# EAGLE board MSP430G2553 H-Bridge_Servo_Sensors Interface (EAGLE 8.6.3)
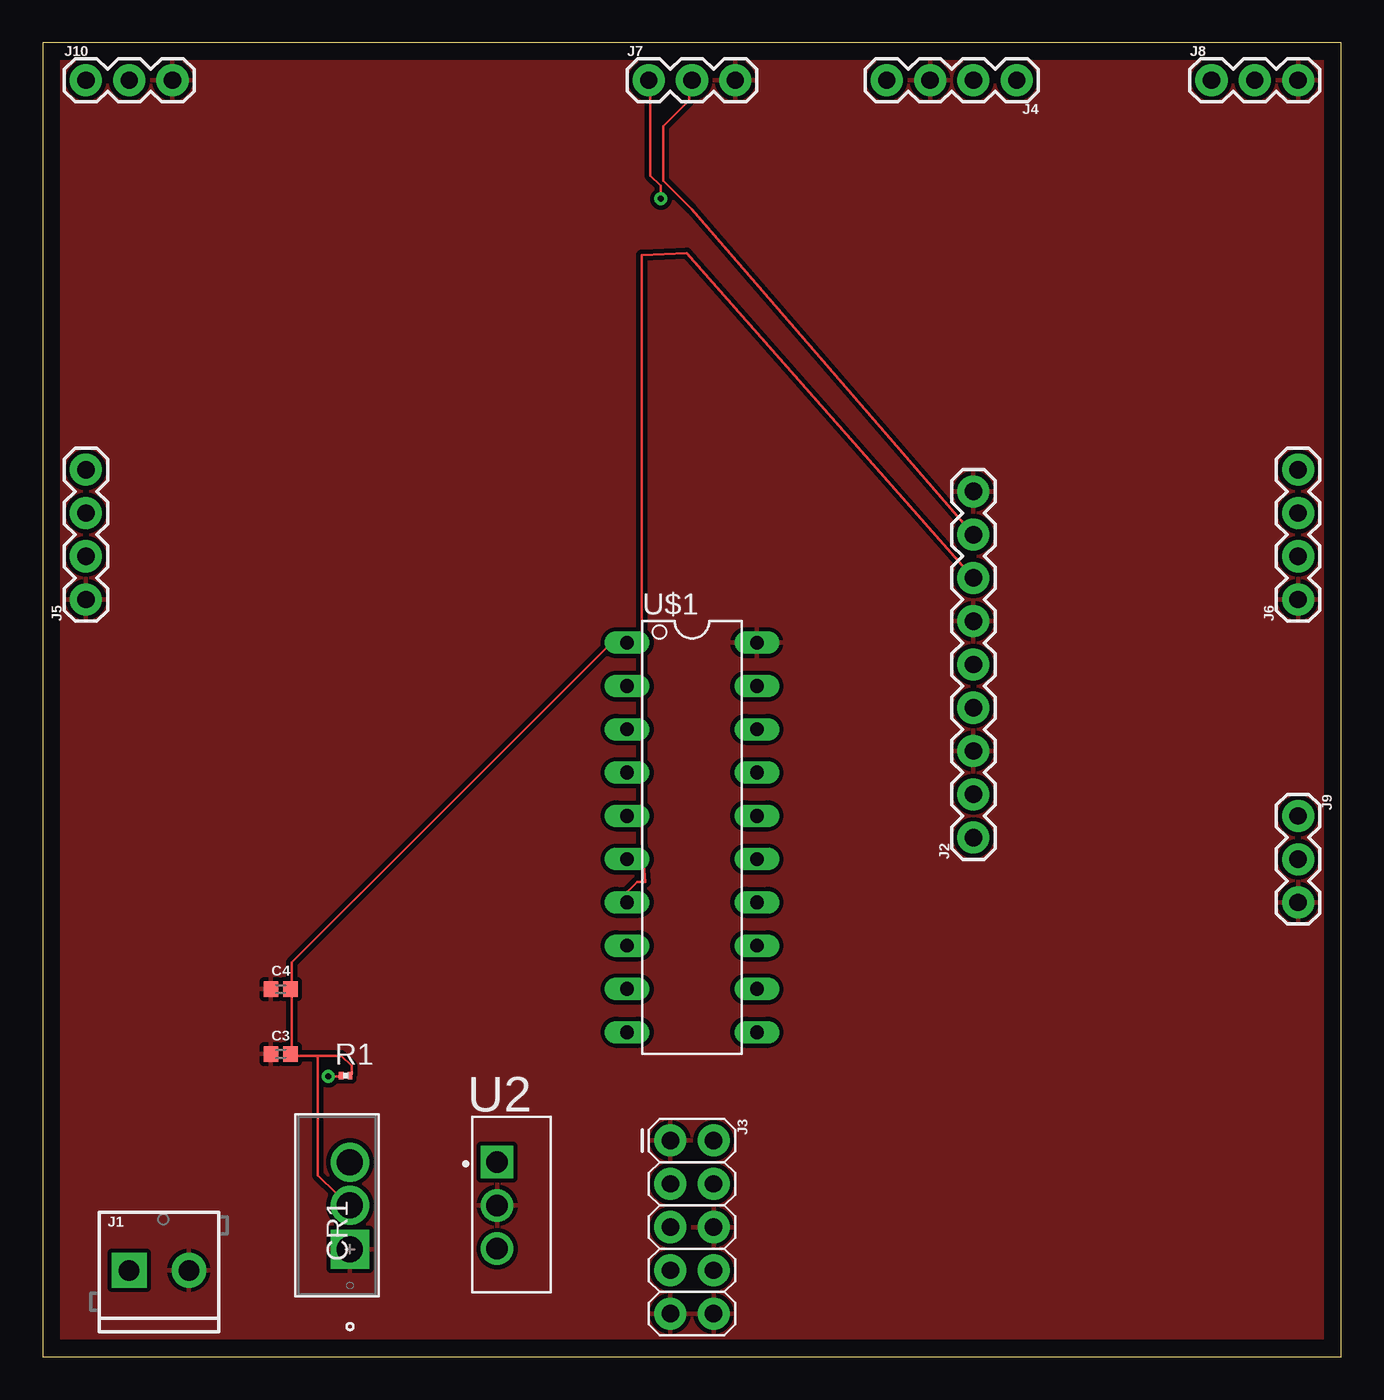
[diagram p0: board, top side]
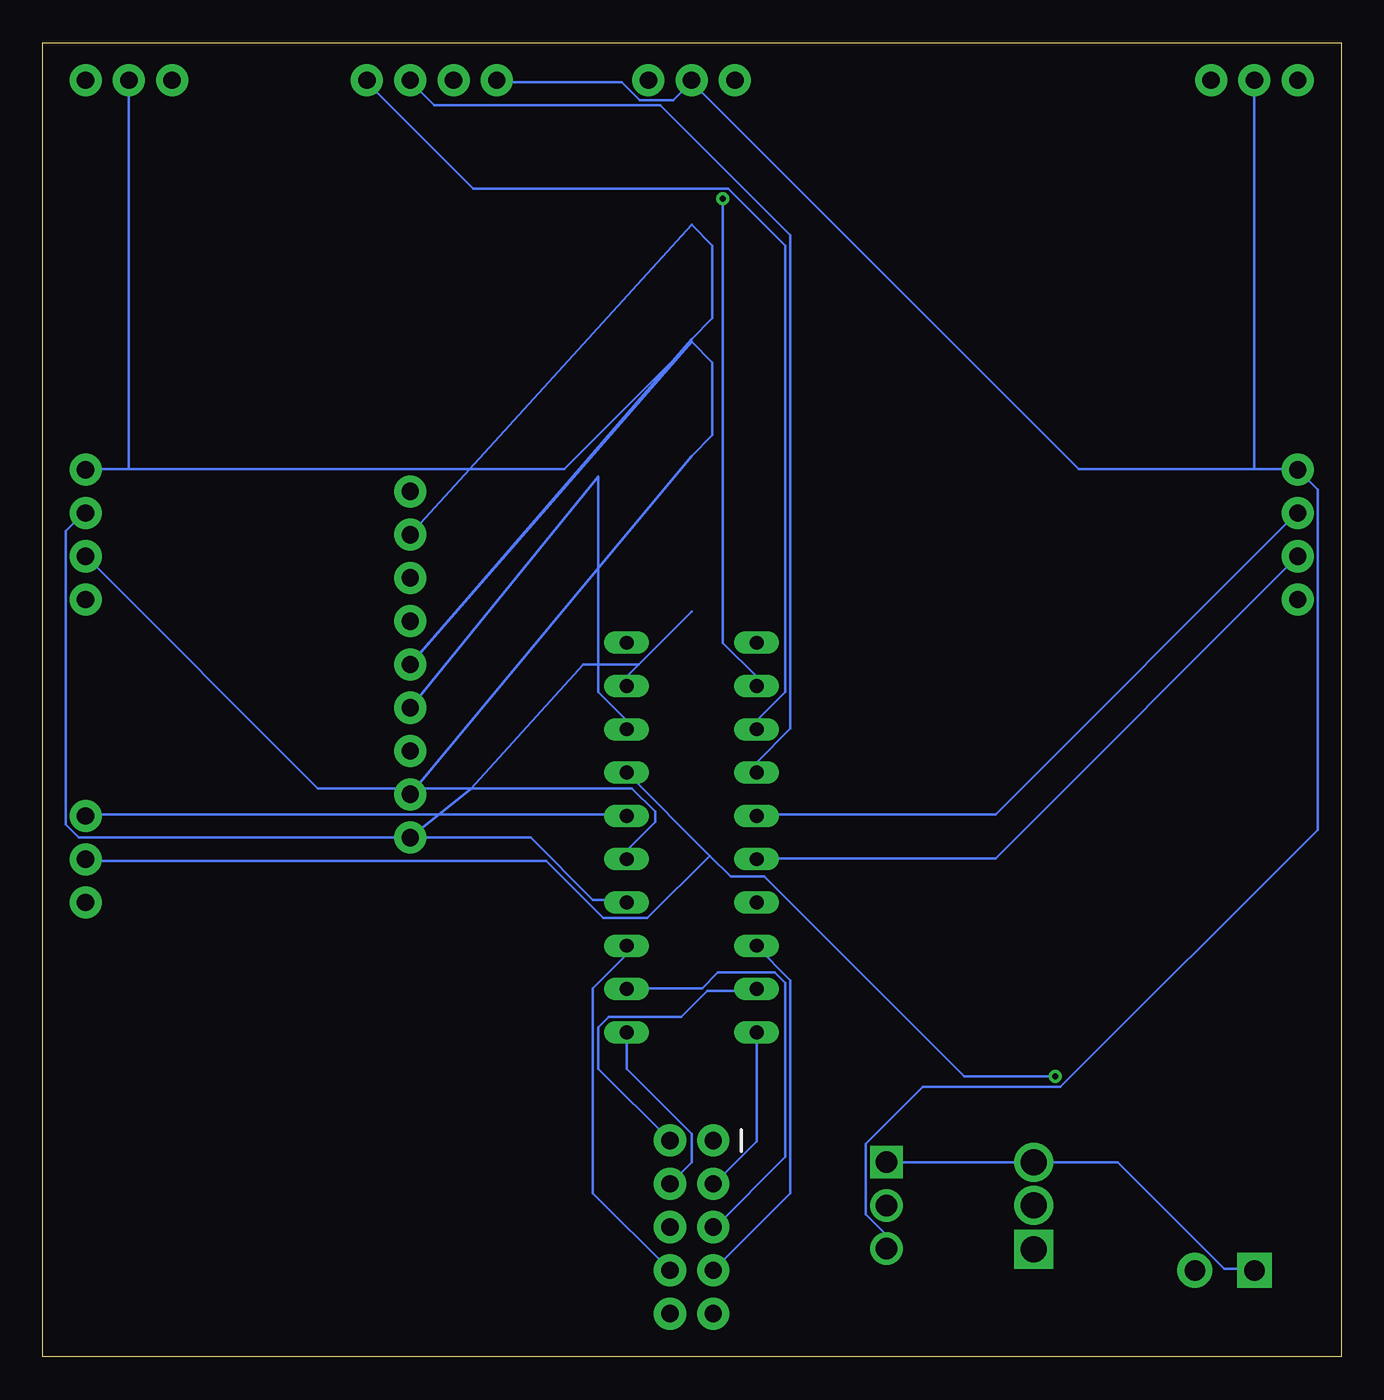
[diagram p1: board, bottom side, seen from below]

Size 76.18 x 77.14 mm. Coordinates in mm from the lower left corner, seen from the top.
Outline: 0,0 76.18,0 76.18,77.14 0,77.14 0,0
Copper layers (1*16): Top 0.035mm / dielectric 1.5mm / Bottom 0.035mm
Design rules "default *": minimum track width 6mil, minimum drill 0.35mm, track to track 5mil, track to pad 5mil, pad to pad 5mil, via to via 5mil, smd to smd 5mil, copper to edge 40mil, drill to drill 6mil, minimum pad ring 10mil, minimum via ring 8mil, stop-mask expansion 4mil, vias tented up to drill 0mil, thermal gap 10mil
Net classes: 0 default: width 0.305 mm, drill 0.508 mm, clearance 0.254 mm

## Footprints (pad centres in the part's own frame; a part is rotated, then mirrored left to right if it is on the bottom)
0402 = smd 0.85 x 0.9: 1 -0.58,0; 2 0.58,0
TO-220 = drill 1.524 pad 2.032 square: 1 -5.105,-1.524 | drill 1.524 pad 2.032: 2 -2.54,-1.524; 3 0,-1.524
SCREWTERMINAL-3.5MM-2 = drill 1.2 pad 2.032 square: 1 0,0 | drill 1.2 pad 2.032: 2 3.5,0
1X09 = drill 1.016 pad 1.88: 1 0,0; 2 2.54,0; 3 5.08,0; 4 7.62,0; 5 10.16,0; 6 12.7,0; 7 15.24,0; 8 17.78,0; 9 20.32,0
2X5 = drill 1.016 pad 1.88: 1 0,0; 2 0,2.54; 3 2.54,0; 4 2.54,2.54; 5 5.08,0; 6 5.08,2.54; 7 7.62,0; 8 7.62,2.54; 9 10.16,0; 10 10.16,2.54
1X04 = drill 1.016 pad 1.88: 1 0,0; 2 2.54,0; 3 5.08,0; 4 7.62,0
1X03 = drill 1.016 pad 1.88: 1 0,0; 2 2.54,0; 3 5.08,0
R0201 = smd 0.28 x 0.43: 1 -0.255,0; 2 0.255,0
TO254P460X1020X1945-3P = drill 1.27 pad 1.91 square: 1 0,2.54 | drill 1.27 pad 1.91: 2 0,0; 3 0,-2.54
N20 = drill 0.813 long: 1 -11.435,-3.81; 2 -8.895,-3.81; 3 -6.355,-3.81; 4 -3.815,-3.81; 5 -1.275,-3.81; 6 1.265,-3.81; 7 3.805,-3.81; 8 6.345,-3.81; 9 8.885,-3.81; 10 11.425,-3.81; 11 11.425,3.81; 12 8.885,3.81; 13 6.345,3.81; 14 3.805,3.81; 15 1.265,3.81; 16 -1.275,3.81; 17 -3.815,3.81; 18 -6.355,3.81; 19 -8.895,3.81; 20 -11.435,3.81

## Placement (x,y rotation side)
C3  0.1uF  [0402]  13.97,17.78 0 top
C4  0.1uF  [0402]  13.97,21.59 0 top
CR1  LD1117V33  [TO-220]  16.51,11.43 90 top
J1  [SCREWTERMINAL-3.5MM-2]  5.08,5.08 0 top
J2  [1X09]  54.61,30.48 90 top
J3  [2X5]  36.83,12.7 270 top
J4  [1X04]  57.15,74.93 180 top
J5  [1X04]  2.54,44.45 90 top
J6  [1X04]  73.66,44.45 90 top
J7  [1X03]  35.56,74.93 0 top
J8  [1X03]  68.58,74.93 0 top
J9  [1X03]  73.66,31.75 270 top
J10  [1X03]  2.54,74.93 0 top
R1  [R0201]  17.78,16.51 0 top
U2  L7805ACV  [TO254P460X1020X1945-3P]  26.67,8.89 0 top
U$1  G2XX3---N20  [N20]  38.1,30.48 270 top

## Library data of the parts
C3 C4 = SparkFun-Capacitors; PROD_ID: CAP-12416
CR1 = LD117V33 Voltage Regulator; MANUFACTURER_PART_NUMBER: LD1117V33; VENDOR: STMicroelectronics
J1 = SparkFun-Connectors; PROD_ID: CONN-08399
J2 J7-J10 = SparkFun-Connectors
J3 = SparkFun-Connectors; PROD_ID: CONN-08499; SF_ID: PRT-0778
J4-J6 = SparkFun-Connectors; PROD_ID: CONN-09696
R1 = rcl; SPICEPREFIX: R
U2 = L7805ACV; DESCRIPTION: IC REG LINEAR 5V 1.5A TO220AB; DIGI-KEY_PART_NUMBER: 497-1441-5-ND; DIGI-KEY_PURCHASE_URL: https://www.digikey.com/product-detail/en/stmicroelectronics/L7805ACV/497-1441-5-ND/585962?WT.z_cid=ref_snapeda&utm_source=snapeda&utm_medium=aggregator&utm_campaign=buynow; MF: STMicroelectronics; MP: L7805ACV; PACKAGE: TO-220 STMicroelectronics
U$1 = TI_MSP430_v16 schematic

## Nets
3.3V: C3.2 C4.2 CR1.2 R1.2 U$1.1
5V: J2.2 J2.5 J2.8 J4.4 J5.4 J6.4 J7.2 J8.2 J10.2 U2.3
+12V: CR1.3 J1.1 U2.1
EN-A: J3.7 U$1.8
EN-B: J3.8 U$1.13
GND: C3.1 C4.1 CR1.1 J1.2 J2.3 J2.6 J2.9 J3.1 J3.6 J3.9 J3.10 J4.3 J5.1 J6.1 J7.3 J8.3 J9.3 J10.3 U2.2 U$1.20
IN-1: J3.2 U$1.9
IN-2: J3.3 U$1.10
IN-3: J3.4 U$1.11
IN-4: J3.5 U$1.12
IR: J7.1 U$1.2
LT-ECHO: J5.2 U$1.6
LT-TRIG: J5.3 U$1.5
MAGNET: J2.7 U$1.7
N$20: J9.2 R1.1 U$1.17
RST: J9.1 U$1.16
RT-ECHO: J6.2 U$1.15
RT-TRIG: J6.3 U$1.14
RX: J4.1 U$1.3
SERVO1: J2.1 U$1.19
SERVO2: J2.4 U$1.18
TX: J4.2 U$1.4

## Tracks (layer width: path | path; a pad name or v marks a point on that pad's centre or on a via)
3.3V
  Top 0.152: 16.15,17.68 14.63,17.68 C3.2 14.63,17.83 14.63,21.49 C4.2 14.63,21.64 14.63,23.16 33.38,41.91 U$1.1 | 16.15,17.68 17.53,17.68 18.14,17.07 18.14,16.61 R1.2 | 16.15,17.68 16.15,10.67 17.22,9.6 17.37,9.6 17.98,8.99 CR1.2
5V
  Top 0.152: J2.8 38.1,67.36 36.42,69.04 36.42,72.24 37.95,73.76 37.95,74.68 38.1,74.83 J7.2
  Bottom 0.152: J2.2 43.7,46.15 38.1,52.88 36.88,54.1 36.88,58.37 38.1,59.59 | J2.8 38.1,66.45 36.88,65.23 36.88,60.96 38.1,59.74 J2.5 38.1,59.59 | 71.12,52.12 45.57,52.12 38.1,59.59 | 71.12,52.12 73.61,52.12 J6.4 | 5.08,52.12 15.39,52.12 38.1,74.83 | 5.08,52.12 2.59,52.12 J5.4 1.37,50.9 1.37,30.94 16.46,15.85 24.54,15.85 27.89,12.5 27.89,8.38 26.67,7.16 U2.3 | 38.1,74.83 39.17,73.76 41.15,73.76 42.22,74.83 49.53,74.83 J4.4 | 38.1,74.83 J7.2 | J10.2 5.08,52.12 | J8.2 71.12,52.12
+12V
  Bottom 0.152: U2.1 CR1.3 13.11,11.43 6.86,5.18 5.18,5.18 J1.1
EN-A
  Bottom 0.152: J3.7 32.31,9.6 32.31,22.1 34.29,24.08 U$1.8
EN-B
  Bottom 0.152: U$1.13 41.91,23.62 43.89,21.64 43.89,9.6 J3.8
GND
  pour Top: -1.27,78.74 -1.27,-1.27 77.47,-1.27 77.47,78.74
IN-1
  Bottom 0.152: J3.2 43.59,16.92 43.59,19.36 42.98,19.96 38.71,19.96 37.19,21.49 34.29,21.49 U$1.9
IN-2
  Bottom 0.152: U$1.10 34.29,12.65 36.73,10.21 J3.3
IN-3
  Bottom 0.152: U$1.11 41.91,16.92 38.1,13.11 38.1,11.43 J3.4
IN-4
  Bottom 0.152: U$1.12 41.91,21.64 37.49,21.64 36.58,22.55 33.22,22.55 32.61,21.95 32.61,11.73 36.73,7.62 J3.5
IR  (via drill 0.35)
  Top 0.152: v36.27,67.97 36.27,68.73 35.66,69.34 35.66,74.83 J7.1
  Bottom 0.152: U$1.2 34.29,39.93 36.27,41.91 v36.27,67.97
LT-ECHO
  Bottom 0.152: J5.2 20.27,29.26 34.29,29.26 U$1.6
LT-TRIG
  Bottom 0.152: U$1.5 34.29,31.85 20.27,31.85 2.59,49.53 J5.3
MAGNET
  Top 0.152: U$1.7 34.29,27.28 34.9,27.89 35.36,27.89 35.15,30.23 35.15,64.67 37.8,64.77 J2.7
N$20  (via drill 0.35)
  Top 0.152: v16.76,16.46 17.53,16.46 R1.1
  Bottom 0.152: v16.76,16.46 22.1,16.46 33.83,28.19 35.81,28.19 37.03,29.41 | 37.03,29.41 U$1.17 | 37.03,29.41 40.69,25.76 43.28,25.76 46.63,29.11 73.61,29.11 J9.2
RST
  Bottom 0.152: U$1.16 41.91,31.85 73.61,31.85 J9.1
RT-ECHO
  Bottom 0.152: U$1.15 41.91,29.72 40.23,31.39 40.23,32 41.6,33.38 60.05,33.38 J6.2
RT-TRIG
  Bottom 0.152: U$1.14 41.91,26.82 43.89,26.82 47.55,30.48 74.07,30.48 74.83,31.24 74.83,48.46 73.76,49.53 J6.3
RX
  Bottom 0.152: U$1.3 34.29,37.34 32.61,39.01 32.61,65.23 35.97,68.58 50.9,68.58 57.15,74.83 J4.1
SERVO1
  Bottom 0.152: U$1.19 41.91,39.93 41.2,40.64 | J2.1 51.05,33.34 44.45,40.64 41.2,40.64 | 41.2,40.64 38.1,43.74
SERVO2
  Bottom 0.152: U$1.18 41.91,37.34 43.59,39.01 43.59,51.66 J2.4
TX
  Bottom 0.152: U$1.4 34.29,34.9 32.31,36.88 32.31,65.84 39.93,73.46 53.19,73.46 54.56,74.83 J4.2